# Altium PCB PCB1.PcbDoc
Units mil, origin at the board's own origin, x right, y up, seen from the top; angles counter-clockwise.
Board outline 2415 x 1225 mil, 2 copper layers (Top Layer, Bottom Layer); 31 components, 34 nets, 118 pads, 32 vias.
Unrouted connection lines stored in the file: 5.
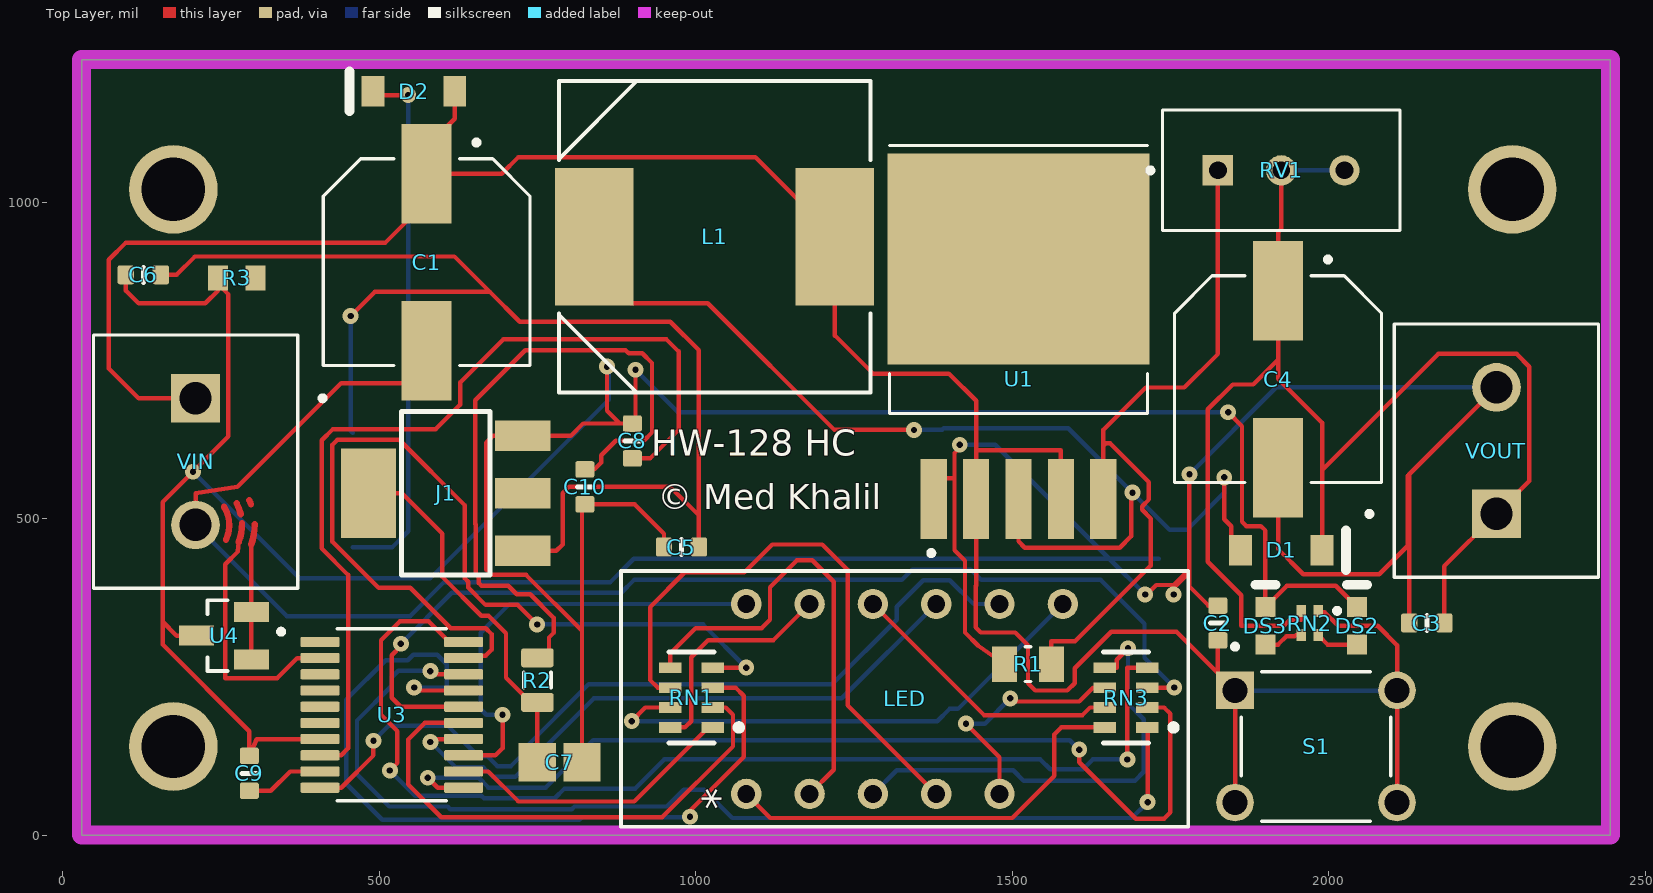
[diagram p0: Top Layer view]
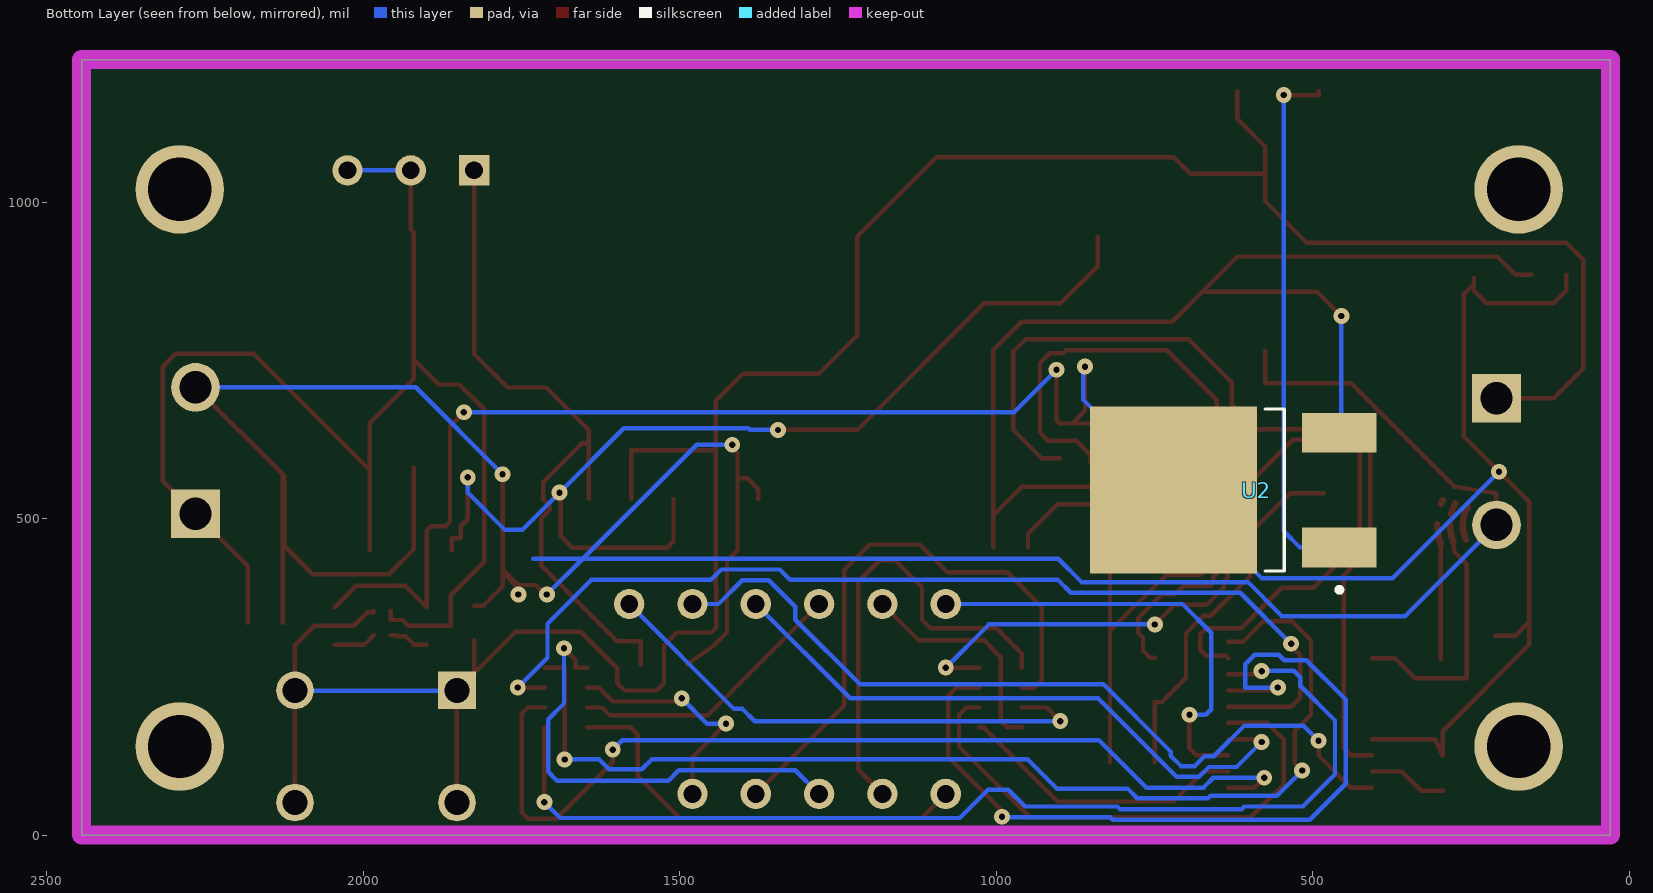
[diagram p1: Bottom Layer view, seen from below]
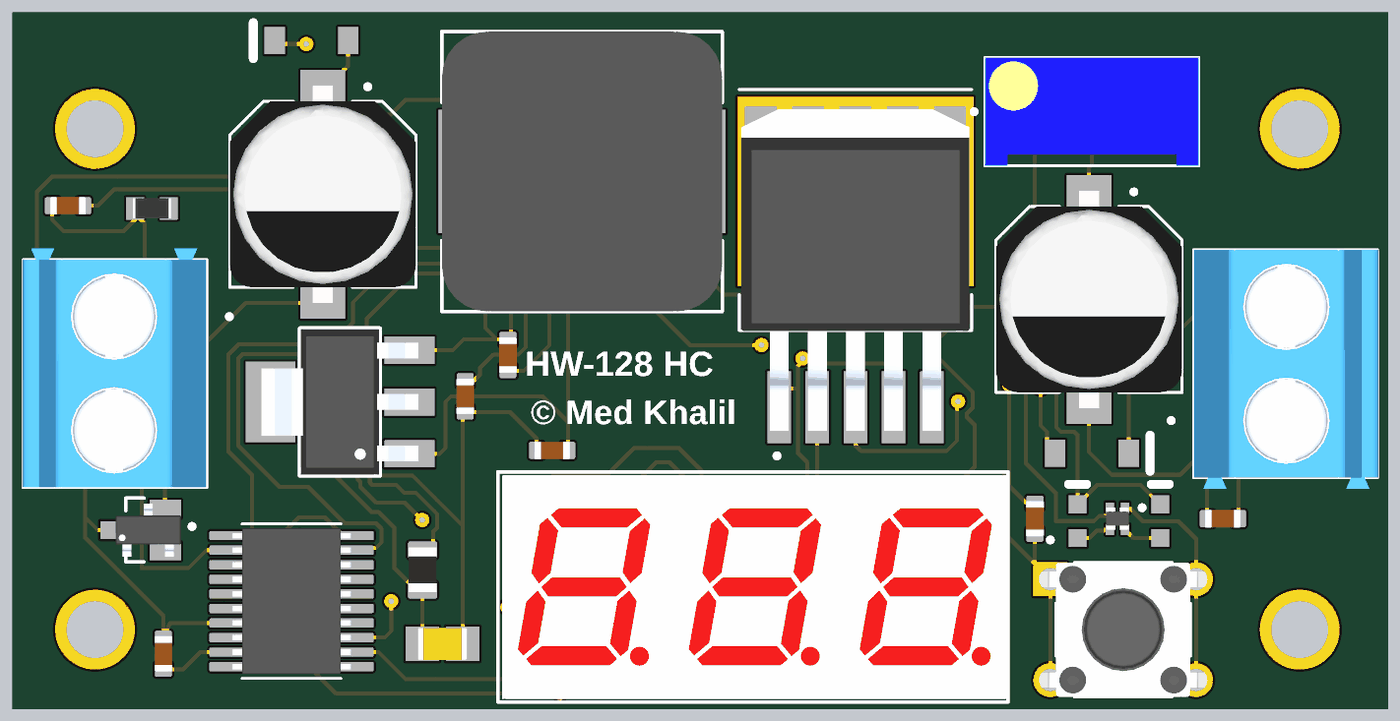
[diagram p2: 3D render of the assembled board from above, using the file's embedded part models]

## Layer stack, top to bottom
Top Solder: solder mask 0.4, Solder Resist, Dk 3.5
Top Layer: signal copper 1.4
Dielectric 1: dielectric 12.6, FR-4, Dk 4.8
Bottom Layer: signal copper 1.4
Bottom Solder: solder mask 0.4, Solder Resist, Dk 3.5

## Board outline
30,0 30,1225 2445,1225 2445,0

## Design rules (kind name [scope] priority, off if disabled: settings)
Clearance [All] p1: gap=10 ignorepadtopadclearanceinfootprint=FALSE
PolygonConnect [All] p1: connectstyle=Relief reliefconductorwidth=10 reliefentries=4 polygonreliefangle="90 Angle" airgapwidth=10
RoutingVias [All] p1: holewidth=10 width=25 viastyle="Through Hole" minholewidth=10 minwidth=25 maxholewidth=10 maxwidth=25
SolderMaskExpansion [All] p1: expansion=4 istentingtop=FALSE
SupplyNets "Schematic Supply Nets_1" [InNet('+3.3')] p1: voltage=0.000
SupplyNets "Schematic Supply Nets" [InNet('GND')] p2: voltage=0.000
Width [All] p1: maxlimit=7 minlimit=7 preferedwidth=7 minimp=50.000000 maximp=50.000000 favimp=50.000000
30 further rules are at their usual default settings.

## Components (designator, comment, footprint, x,y, rotation, side; value= is the part's Value field where it differs from the comment)
C1 "EEEFK1V221P" CAP_EEEFK1V221P 575,905 r270 top
C2 "Capacitor 10µF +/-20% 10V 0603" CAPC0603(1608)100_L 1825,335 r270 top value=10µF
C3 "Capacitor 10µF +/-20% 10V 0603" CAPC0603(1608)100_L 2155,335 r0 top value=10µF
C4 "EEEFK1V221P" CAP_EEEFK1V221P 1920,720.24 r270 top
C5 "Capacitor 10µF +/-20% 10V 0603" CAPC0603(1608)100_L 977.56,455 r0 top value=10µF
C6 "Capacitor 10µF +/-20% 10V 0603" CAPC0603(1608)100_L 127.56,885 r0 top value=10µF
C7 "Capacitor 1 uF +/- 10% 25 V 0805" CAPC2013X145X50ML20T25 785,115 r180 top value=1µF
C8 "Capacitor 10µF +/-20% 10V 0603" CAPC0603(1608)100_L 900,622.56 r270 top value=10µF
C9 "Capacitor 10µF +/-20% 10V 0603" CAPC0603(1608)100_L 295,97.56 r270 top value=10µF
C10 "Capacitor 10µF +/-20% 10V 0603" CAPC0603(1608)100_L 825,550 r270 top value=10µF
D1 "B5819W" MCC-SOD123_V 1925,450 r0 top
D2 "B5819W" MCC-SOD123_V 555,1175 r180 top
DS2 "HSMH-C190" AVAG-HSMX-C190_V 2045,330.47 r90 top
DS3 "LTST-C190GKT" LTST-C190GKT_V 1900,330.47 r90 top
J1 "LD1117AS33" SOT223 605,540 r90 top
L1 "DR125-470-R" INDM125125X600N 1030,945 r0 top
LED "LDT-N2804RI" LDT-N2804RI_LUM 1080,65 r90 top
R1 "CR0805-FX-3300ELF" RESC2012X60N 1525,270 r0 top
R2 "Resistor 470R +/-5% 0805 125 mW" RESC0805(2012)_L 750,245 r90 top value=470
R3 "Resistor 0R +/- 5% 0603 100 mW" RESC1608X55X25ML10T15 275,880 r0 top value=0
RN1 "CAY16-101J4LF" FP-CAY16-J4-MFG 993.46,217.24 r90 top
RN2 "EXB-U24202JX" RESCAXE_EXB-U24202JX 1970,335 r180 top
RN3 "CAY16-101J4LF" FP-CAY16-J4-MFG 1680,217.24 r90 top
RV1 "3296W1103LF" TRIM_3296W1103LF 1925,1050 r0 top
S1 "TS02-66-60-BK-100-LCR-D" SW_TS02-66-60-BK-100-LCR-D 1980,140 r0 top
U1 "XL6009" DPAK170P1435X465-6N 1510,772.2 r90 top
U2 "L78M05CDT" VREG_L78M05CDT 625.51,545 r0 bottom
U3 "STM8S003F3P6" SOP65P640X120-20N 520,190 r0 top
U4 "TL431LIBCDBZR" SOT23 255,315 r90 top
VIN "TB006-508-02BE" CUI_TB006-508-02BE 210,690 r270 top
VOUT "TB006-508-02BE" CUI_TB006-508-02BE 2265,507.34 r90 top

## Footprints (in the part's own frame and the unit in brackets; to place one, negate y for a bottom-side part, rotate by r counter-clockwise, add the part's x,y. Pads: shape width x height; smd on the part's side, far side on the other; paste and mask are expansions set on the pad)
AVAG-HSMX-C190_V [mm] "SMD, 2-Leads, Body 1.6x0.8mm, Height 0.9mm"
  rect 0.8x0.8 smd: 1(-0.75,0) 2(0.75,0)
  silkscreen extent 1.65,-0.4 1.65,0.4, body extent -0.8,-0.4 0.8,0.4, height 0.9
CAP_EEEFK1V221P [mm]
  rect 4x2 smd: 1(-3.55,0) 2(3.55,0)
  silkscreen extent -4.9,-4.15 4.15,4.15, body extent -4.85,-4.15 4.85,4.15, height 10.2
CAPC0603(1608)100_L [mil] "Chip Capacitor, Body 1.6x0.8mm, Height 1.0mm, IPC High Density"
  rrect25% 26x29.92 smd: 1(-27.56,0) 2(27.56,0)
  silkscreen extent 0,-12 0,12, body extent -31,-16 31,16, height 37
CAPC2013X145X50ML20T25 [mm] "Chip Capacitor, 2-Leads, Body 2.2x1.45mm, IPC Low Density"
  rect 1.5x1.55 smd: 1(-0.9,0) 2(0.9,0)
  body extent -1.1,-0.72 1.1,0.73, height 1.45
CUI_TB006-508-02BE [mm]
  rect 1.95x1.95 / inner round 1.95 / far side rect 1.95x1.95 hole 1.3: 1(0,0)
  round 1.95 hole 1.3: 2(5.08,0)
  silkscreen extent -2.54,-4.1 7.62,5.2, body extent -3.04,-4.14 7.62,4.06, height 10
DPAK170P1435X465-6N [mm]
  rect 3.21x1.05 smd: 1(-6.13,3.4) 2(-6.13,1.7) 3(-6.13,0) 4(-6.13,-1.7) 5(-6.13,-3.4)
  rect 8.46x10.53 smd paste-6: 6(3.5,0)
  silkscreen extent -8.4,-5.18 8.05,5.18, body extent -7.17,-5.08 7.17,5.08, height 4.65
FP-CAY16-J4-MFG [mm]
  rect 0.425x0.9 smd paste+0 mask+0: 1(-1.2,-0.85) 2(-0.4,-0.85) 3(0.4,-0.85) 4(1.2,-0.85) 5(1.2,0.85) 6(0.4,0.85) 7(-0.4,0.85) 8(-1.2,0.85)
  silkscreen extent -1.82,-2.02 1.82,0.9, body extent -1.8,-1.4 1.8,1.4, height 0.25
INDM125125X600N [mil]
  rect 124x217 smd: 1(-190,0) 2(190,0)
  silkscreen extent -246,-246 246,246, body extent -246,-246 246,246, height 217
LDT-N2804RI_LUM [mil]
  round 48 hole 28: 1(0,0) 2(0,-100) 3(0,-200) 4(0,-300) 5(0,-400) 7(300,-500) 8(300,-400) 9(300,-300) 10(300,-200) 11(300,-100) 12(300,0)
  silkscreen extent -52,-698 352,198, body extent -47,-697 347,190, height 240
LTST-C190GKT_V [mm] "SMD, 2-Leads, Body 1.6x0.8mm"
  rect 0.8x0.8 smd: 1(-0.75,0) 2(0.75,0)
  silkscreen extent 1.65,-0.4 1.65,0.4, body extent -0.8,-0.4 0.8,0.4, height 0.9
MCC-SOD123_V [mil] "SOD123, 2-Leads, Body 2.7x1.6mm, Height 1.35mm"
  rect 35.98x47.99 smd: 1(-64.5,0) 2(64.5,0)
  silkscreen extent 102,-31 102,31, body extent -53,-31 53,31, height 53
RESC0805(2012)_L [mm] "Chip Resistor, Body 2.0x1.3mm, IPC High Density"
  rrect25% 0.76x1.3 smd: 1(-0.9,0) 2(0.89,0)
  silkscreen extent -0.3,-0.55 0.3,0.55, body extent -1,-0.62 1,0.63, height 0.6
RESC1608X55X25ML10T15 [mm] "Chip Resistor, 2-Leads, Body 1.70x0.90mm, IPC Low Density"
  rect 0.8x1 smd: 1(-0.75,0) 2(0.75,0)
  body extent -0.85,-0.45 0.85,0.45, height 0.55
RESC2012X60N [mm]
  rect 1x1.42 smd: 1(-0.935,0) 2(0.935,0)
  silkscreen extent -0.12,-0.7 0.12,0.7, body extent -1,-0.63 1,0.63, height 0.55
RESCAXE_EXB-U24202JX [mm]
  rect 0.375x0.475 smd: 1(-0.338,-0.487) 2(0.338,-0.487) 3(0.338,0.487) 4(-0.338,0.487)
  silkscreen extent -1.2,-0.59 -1,-0.39, body extent -0.5,-0.5 0.5,0.5, height 0.45
SOP65P640X120-20N [mm]
  rrect25% 1.56x0.41 smd: 1(-2.88,2.925) 2(-2.88,2.275) 3(-2.88,1.625) 4(-2.88,0.975) 5(-2.88,0.325) 6(-2.88,-0.325) 7(-2.88,-0.975) 8(-2.88,-1.625) 9(-2.88,-2.275) 10(-2.88,-2.925) 11(2.88,-2.925) 12(2.88,-2.275) 13(2.88,-1.625) 14(2.88,-0.975) 15(2.88,-0.325) 16(2.88,0.325) 17(2.88,0.975) 18(2.88,1.625) 19(2.88,2.275) 20(2.88,2.925)
  silkscreen extent -4.54,-3.45 2.2,3.45, body extent -3.2,-3.25 3.2,3.25, height 0.53
SOT23 [mm]
  rect 0.8x1.4 smd: 1(-0.95,-1.1) 2(0.95,-1.1) 3(0,1.1)
  silkscreen extent -1.42,-0.15 1.42,0.66, body extent -1.46,-1.52 1.46,0.85, height 1.12
SOT223 [mm]
  rect 1.219x2.235 smd: 1(-2.311,-3.099) 2(0,-3.099) 3(2.311,-3.099)
  rect 3.6x2.2 smd: TAB(0,3.099)
  silkscreen extent -3.28,-1.78 3.28,1.78, body extent -3.25,-3.5 3.25,3.5, height 1.8
SW_TS02-66-60-BK-100-LCR-D [mm]
  rect 1.508x1.508 / inner round 1.508 / far side rect 1.508x1.508 hole 1: 1(-3.25,2.25)
  round 1.508 hole 1: 2(3.25,2.25) 3(-3.25,-2.25) 4(3.25,-2.25)
  silkscreen extent -3.35,-3 3,4.1, body extent -3.95,-3 3.95,3, height 6
TRIM_3296W1103LF [mm]
  rect 1.218x1.218 hole 0.71: 1(-2.54,0)
  round 1.218 hole 0.71: 2(0,0) 3(2.54,0)
  silkscreen extent -5.35,-2.41 4.76,2.42, body extent -4.76,-2.41 4.76,2.42, height 11.18
VREG_L78M05CDT [mm]
  rect 3x1.6 smd: 1(-4.25,2.3) 3(-4.25,-2.3)
  rect 6.7x6.7 smd paste-2.645: 2(2.4,0)
  silkscreen extent -4.35,-3.25 -1.26,4.1, body extent -4.72,-3.25 5,3.25, height 2.4

## Part data
C1 C4: "220ÂµF 35V Aluminum Electrolytic Capacitors Radial, Can - SMD 2000 Hrs @ 105Â°C", Package="RADIAL-2 Panasonic", Check_prices=https://www.snapeda.com/parts/EEEFK1V221P/Panasonic/view-part/?ref=eda, MF=Panasonic, MP=EEEFK1V221P, SnapEDA_Link=https://www.snapeda.com/parts/EEEFK1V221P/Panasonic/view-part/?ref=snap
C2 C3 C5 C6 C8 C9 C10: library part CMP-001-00075-4, "Chip Capacitor, 10µF +/-20%, 10V, 0603, Thickness 1 mm", Case/Package=0603, Max Operating Temperature=85°C, Min Operating Temperature=-55°C, Tolerance=10%, Voltage Rating=10V, Mounting Technology=SMT, Pins=2
C7: library part CMP-001-00010-6, "Chip Capacitor, 1 uF, +/-10%, 25 V, 0805 (2012 Metric)", Capacitor Type=Ceramic, Case/Package=0805, Max Operating Temperature=125°C, Min Operating Temperature=-55°C, Tolerance=10%, Voltage Rating=25V, Mounting Technology=SM, Pins=2, RoHS Compliant=True
D1 D2: library part CMP-004-00005-2, "Schottky Barrier Rectifier, 40 V, 1 A, -65 to 125 degC, 2-Pin SOD123, RoHS, Tape and Reel", Case/Package=SOD123, Manufacturer="Micro Commercial Components", Package Description="2-Pin Small Outline Diode, Body 2.7 x 1.6 mm, Height 1.35 mm", Datasheet URL=http://www.mccsemi.com/up_pdf/B5817W-B5819W(SOD-123).pdf, Datasheet Version="Rev. B, 01/2013", Manufacturer URL=http://www.mccsemi.com/, Mounting Technology=SM, Package Reference=SOD123, Package URL=http://www.mccsemi.com/up_pdf/1N4448W(SOD-123).pdf, RoHS Compliant=Unknown
DS2: library part CMP-007-00014-2, "LED Uni-Color Red, 65 mW, 20 mA, -40 to 85 degC, 2-Pin SMD, RoHS, Tape and Reel", Case/Package=0603, Colour=Red, Forward Current=20mA, Forward Voltage=1.8V, Manufacturer=Avago, Max Operating Temperature=85°C, Min Operating Temperature=-40°C, Package Description="2-Pin Surface Mount Device, Body 1.6 x 0.8 mm, Height 0.9 mm", Package Quantity=4000, Package Reference=HSMX-C190, Power=78mW, Datasheet URL=http://docs.avagotech.com/docs/AV02-0551EN, Datasheet Version=Mar-12, Illumination Colour=Red, Lens Style=Diffused, Luminous Intensity=17mcd, Manufacturer URL=http://www.avagotech.com/, Mounting Technology=SM, Nominal Vf=1.8V, Packaging=TapeandReel, Pins=2, RoHS Compliant=True, Viewing Angle=170degrees
DS3: library part CMP-007-00022-2, "LED Uni-Color Green, 100 mW, 30 mA, -55 to 85 degC, 2-Pin SMD, RoHS, Tape and Reel", Case/Package=0603, Colour=Green, Forward Current=20mA, Forward Voltage=2.1V, Manufacturer=Lite-On, Max Operating Temperature=85°C, Min Operating Temperature=-55°C, Package Description="2-Pin Surface Mount Device, Body 1.6 x 0.8 mm", Package Quantity=3000, Package Reference=C190GKT, Power=100mW, Datasheet URL=http://datasheet.octopart.com/LTST-C190GKT-Lite-On-datasheet-158530.pdf, Datasheet Version=Dec-06, Illumination Colour=Green, Lens Style=Clear, Luminous Intensity=6mcd, Manufacturer URL=http://www.us.liteon.com/, Mounting Technology=SM, Nominal Vf=2.1V, Packaging=TapeandReel, Pins=2, RoHS Compliant=True, Viewing Angle=130degrees
J1: "Linear Voltage Regulator IC Positive Fixed 1 Output 1A SOT-223", Package="SOT-223 STMicroelectronics", Check_prices=https://www.snapeda.com/parts/LD1117AS33/STMicroelectronics/view-part/?ref=eda, MF=STMicroelectronics, MP=LD1117AS33, SnapEDA_Link=https://www.snapeda.com/parts/LD1117AS33/STMicroelectronics/view-part/?ref=snap
L1: "47ÂµH Shielded Wirewound Inductor 2.71A 74mOhm Nonstandard", Package="Nonstandard Eaton", Check_prices=https://www.snapeda.com/parts/DR125-470-R/Eaton/view-part/2729976/?ref=eda, Digi-Key_Part_Number=513-1128-1-ND, MF=Eaton, MP=DR125-470-R, Purchase-URL=https://pricing.snapeda.com/search/part/DR125-470-R/?ref=eda, SnapEDA_Link=https://www.snapeda.com/parts/DR125-470-R/Eaton/view-part/2729976/?ref=snap
LED: "Display Modules - LED Character and Numeric Red 7-Segment 3 Character Common Cathode 2V 10mA 0.394 H x 0.887 W x 0.240 D (10.00mm x 22.53mm x 6.10mm) 12-DIP (0.300, 7.62mm), 11 Leads", Package=None, Check_prices=https://www.snapeda.com/parts/LDT-N2804RI/Lumex/view-part/?ref=eda, MF="Lumex Opto/Components", MP=LDT-N2804RI, SnapEDA_Link=https://www.snapeda.com/parts/LDT-N2804RI/Lumex/view-part/?ref=snap
R1: "330 Ohms Â±1% 0.125W, 1/8W Chip Resistor 0805 _2012 Metric_ Moisture Resistant Thick Film", Package="2012 Bourns", Availability=Unavailable, MF=Bourns, MP=CR0805-FX-3300ELF, Price=None, SnapEDA_Link=https://www.snapeda.com/parts/CR0805-FX-3300ELF/Bourns/view-part/942422/?ref=snap
R2: library part CMP-009-00122-3, "Chip Resistor, 470 Ohms, +/-5%, 125 mW, -55 to 155 degC, 0805", Case/Package=0805, Max Operating Temperature=155°C, Min Operating Temperature=-55°C, Power=125mW, Tolerance=5%, Pins=2
R3: library part CMP-009-00006-5, "Chip Resistor, 0 Ohm, 0.1 W, -55 to 155 degC, 0603 (1608 Metric)", Case/Package=0603, Max Operating Temperature=155°C, Min Operating Temperature=-55°C, Power=100mW, Tolerance=5%, Voltage Rating=50V, Mounting Technology=SM, Pins=2, RoHS Compliant=True
RN1 RN3: library part CMP-07230-000011-1, "RES ARRAY 4 RES 100 OHM 1206", Case Code (Imperial)=1206, Case Code (Metric)=3216, Max Operating Temperature=125°C, Min Operating Temperature=-55°C, Number of Resistors=4, Package Quantity=5000, Power Per Element=62.5mW, Power Rating=248mW, Resistance=100R, Resistance Tolerance=5%, Temperature Coefficient=200ppm/°C, Voltage Rating=50V, Case/Package=1206, Circuit Type=Isolated, Contact Plating=Tin, Depth=1.6mm, Height=0.024inch, Length=3.2mm, Military Standard=Not, Mount="Surface Mount", Number of Circuits=4, Number of Elements=4, Number of Pins=8, Number of Terminals/Pins=8, Packaging="Tape and Reel", Radiation Hardening=No, REACH SVHC="No SVHC", Series=CAY16, Technology="THICK FILM", Terminal Pitch=0.8mm, Termination=Convex, Tolerance=5%, Voltage Rating (DC)=50V, Width=0.063inch
RN2: "Series/Type: Anti-Sulfurated Chip Resistor Array, Power Rating (W): 0.063, Chip Size (LxW) (mm): 1.0 X 1.0, Resistance Values (â„", Package="NON STANDARD-4 Panasonic", Check_prices=https://www.snapeda.com/parts/EXB-U24202JX/Panasonic/view-part/?ref=eda, MF=Panasonic, MP=EXB-U24202JX, SnapEDA_Link=https://www.snapeda.com/parts/EXB-U24202JX/Panasonic/view-part/?ref=snap
RV1: "Trimmer, Potentiometer 10kohm 25turn Thd", Package=None, Availability=Unavailable, Check_prices=https://www.snapeda.com/parts/3296W1103LF/Bourns/view-part/2487625/?ref=eda, MF=Bourns, MP=3296W1103LF, Price=None, SnapEDA_Link=https://www.snapeda.com/parts/3296W1103LF/Bourns/view-part/2487625/?ref=snap
S1: "6 x 6 mm, 6 mm Actuator Height, 100 gf, Black, Long Crimped, Through Hole, SPST, Tactile Switch", Package=None, Check_prices=https://www.snapeda.com/parts/TS02-66-60-BK-100-LCR-D/Same+Sky/view-part/?ref=eda, MF="Same Sky", MP=TS02-66-60-BK-100-LCR-D, SnapEDA_Link=https://www.snapeda.com/parts/TS02-66-60-BK-100-LCR-D/Same+Sky/view-part/?ref=snap
U1: "The XL6009 regulator is a wide input range, current mode, DC/DC converter which is capable of generating either positive or negative output voltages.", Package="TO-263-5L XLSEMI", Availability="Not in stock", Check_prices=https://www.snapeda.com/parts/XL6009/XLSEMI/view-part/?ref=eda, MF=XLSEMI, MP=XL6009, Price=None, SnapEDA_Link=https://www.snapeda.com/parts/XL6009/XLSEMI/view-part/?ref=snap
U2: "7805 based precision 5V fixed regulator with output current of up to 500mA and wide temperature operating range of 0Â°C to 150Â°C.", Package="TO-252-3 STMicroelectronics", Check_prices=https://www.snapeda.com/parts/L78M05CDT/STMicroelectronics/view-part/?ref=eda, MF=STMicroelectronics, MP=L78M05CDT, SnapEDA_Link=https://www.snapeda.com/parts/L78M05CDT/STMicroelectronics/view-part/?ref=snap
U3: "STM8 series Microcontroller IC 8-Bit 16MHz 8KB (8K x 8) FLASH 20-TSSOP", Package="TSSOP-20 STMicroelectronics", Check_prices=https://www.snapeda.com/parts/STM8S003F3P6/STMicroelectronics/view-part/?ref=eda, MF=STMicroelectronics, MP=STM8S003F3P6, SnapEDA_Link=https://www.snapeda.com/parts/STM8S003F3P6/STMicroelectronics/view-part/?ref=snap
U4: "Adjustable precision shunt regulator with optimized reference current (pin layout: KRA)", Package="SOT-23-3 Texas Instruments", Check_prices=https://www.snapeda.com/parts/TL431LIBCDBZR/Texas+Instruments/view-part/?ref=eda, MF="Texas Instruments", MP=TL431LIBCDBZR, SnapEDA_Link=https://www.snapeda.com/parts/TL431LIBCDBZR/Texas+Instruments/view-part/?ref=snap
VIN VOUT: "2~24 Poles, Screw Type, Horizontal, 5.08 Pitch, 26~14 (AWG), Terminal Block Connector", Package=None, Check_prices=https://www.snapeda.com/parts/TB006-508-02BE/Same+Sky/view-part/?ref=eda, MF="Same Sky", MP=TB006-508-02BE, SnapEDA_Link=https://www.snapeda.com/parts/TB006-508-02BE/Same+Sky/view-part/?ref=snap

## Free pads (board coordinates)
  round 140 hole 100: 3(175,140) 3(175,1020) 3(2290,140) 3(2290,1020)

## Via types
v1: diameter 25, hole 10, Top Layer to Bottom Layer, 32 vias

## Nets (pads, with @x,y where several pads share a name; then routed paths per layer and width w, separated by ;. In a path a pad name is that pad's centre, name@x,y a point inside that pad or via, vN(x,y) a via of type N, cw(c..) or ccw(c..) an arc to the next point about the centre after c; other vN are vias at no path point)
+3.3: C7.2 J1.TAB R2.1 | length 579.9
  Top Layer w7: J1.TAB 536,540 599.97,476.03 599.97,407.7 661.15,346.52 672.75,346.52 700.37,318.9 700.37,248.56 739.37,209.57 R2.1 750,162.43 749.57,162 C7.2
GND: C5.1 C6.1 C7.1 C8.1 C9.1 C10.2 DS2.2 DS3.2 J1.3 R3.1 U2.2 U3.7 U4.3 | length 5087.2
  Top Layer w7: C6.1 100,860 120,840 225.47,840 245.47,860 R3.1@245.47,870.53 ; U4.3 180,315 158,337 ; R3.1 R3.1@245.47,870.53 ; U3.7 306.61,151.61 C9.1 295,164 158,301 158,337 ; C7.1 820.43,315.14 ; v1(860,740) 860,670.12 880,650.12 ; v1(905,735) 905,655.12 C8.1 880,650.12 ; C5.1 950,476 903.56,522.44 C10.2 820.43,517.87 820.43,315.14 ; v1(1841.12,667.88) 1863,646 1863,495 1870,488 1893,488 1900,481 DS3.2 1934,394 2011,394 DS2.2 ; 158,337 158,526 v1(206,574) 262,630 262,854 R3.1@245.47,870.53 ; 820.43,315.14 820.43,322.67 732.11,411 677.94,411 669.51,419.43 669.51,497.64 669,498.15 669,620 679.98,630.98 J1.3 803,630.98 822.14,650.12 880,650.12
  Top Layer w10: 255,518.72 cw(c210,490) 258.05,466.74
  Bottom Layer w7: v1(206,574) 374,406 581,406 U2.2 863,688 863,737 v1(860,740) ; v1(905,735) 972.12,667.88 v1(1841.12,667.88)
NetC5_2: C5.2 C6.2 J1.1 U2.3 | length 2041.8
  Top Layer w7: C6.2 180,885 209,914 619,914 675,858 ; v1(455,820) 493,858 675,858 ; J1.1 780,449.02 790,459.02 790,540 800,550 960,550 1005.12,504.88 ; C5.2 1005.12,504.88 ; 675,858 722,811 960,811 1005.12,765.88 1005.12,504.88
  Bottom Layer w7: v1(455,820) 455,638.74 U2.3
NetC8_2: C8.2 U3.8 | length 1426.6
  Top Layer w7: U3.8 440,126.02 451,137.02 451,411 409.18,452.82 409.18,623.5 427.05,641.37 589.37,641.37 628,680 628,715 696,783 954,783 973,764 973,640 928,595 C8.2
NetC9_2: C9.2 U3.9 | length 124.2
  Top Layer w7: C9.2 329,70 359.43,100.43 U3.9
NetC10_1: C10.1 R2.2 U4.1 U4.2 | length 1297.4
  Top Layer w7: 298.05,458.89 298,458.84 298,352.4 U4.2 U4.1 ; R2.2 756.91,280.04 768.35,291.48 768.35,312.09 775.57,319.3 775.57,343.5 738.54,380.52 717.48,380.52 704,394 661.76,394 657.66,398.1 657.66,407.24 652.51,412.39 652.51,490.59 652,491.11 652,687 731,766 889.23,766 894.23,761 915.77,761 931,745.77 931,635.97 918.03,623 874,623 851,600 851,588.56 840,577.56 C10.1
  Top Layer w10: 295,528.68 cw(c210,490) 297.53,522.56 ; 298.05,458.89 ccw(c210,490) 303.38,490.77
NetD1_1: D1.1 L1.1 U1.3 | length 1725.8
  Top Layer w7: L1.1 840,898.5 898.5,840 1019.31,840 1219.31,640 v1(1345,640) ; U1.3 1510,464 1520,454 1669.94,454 1688.28,472.34 1688.28,539.28 v1(1690,541) ; v1(1835.05,565) 1835.05,498.91 1846.01,487.95 1846.01,470.5 1847.5,469 1860.5,469 D1.1
  Bottom Layer w7: v1(1345,640) 1389.3,640 1391.85,642.55 1588.44,642.55 1687,544 v1@1687,541 ; v1@1687,538 v1(1690,541) ; v1@1690,538 1693,538 1749,482 1776,482 1835.05,541.05 v1(1835.05,565)
NetD2_2: D2.2 U2.1 | length 848.9
  Top Layer w7: D2.2 490.5,1169 v1(546,1169)
  Bottom Layer w7: U2.1 520.45,454.45 546,480 v1(546,1169)
NetDS2_1: DS2.1 RN2.4 | length 67.9
  Top Layer w7: RN2.4 1998.15,300.94 DS2.1
NetDS3_1: DS3.1 RN2.3 | length 62.9
  Top Layer w7: DS3.1 1920,300.94 1932.81,313.75 1946.25,313.75 1948.3,315.81 RN2.3
NetLED_1: LED.1 RN3.8 | length 679.8
  Top Layer w7: LED.1 1118,27 1500,27 1566.49,93.49 1566.49,158.88 1577.61,170 RN3.8
NetLED_2: LED.2 RN1.5 | length 736.4
  Top Layer w7: RN1.5 960,287 1000,327 1104.5,327 1117.5,340 1117.5,391.5 1160,434 1184,434 1218,400 1218,103 LED.2
NetLED_3: LED.3 RN3.5 | length 718
  Top Layer w7: RN3.5 1665,264.49 1665,277 v1(1683,295)
  Bottom Layer w7: LED.3 1317.5,102.5 1501.5,102.5 1518,86 1694,86 1708,100 1708,183 1683,208 v1(1683,295)
NetLED_4: LED.4 RN1.6 | length 933.5
  Top Layer w7: RN1.6 940,232.99 928,244.99 928,360 983,415 1077,415 1121,459 1200,459 1240,419 1240,205 LED.4
NetLED_5: LED.5 RN3.6 | length 380.2
  Top Layer w7: v1(1427,176) 1480,123 LED.5 ; v1(1497,216) 1502,211 1606,211 1627.99,232.99 RN3.6
  Bottom Layer w7: v1(1427,176) 1457,176 v1(1497,216)
NetLED_7: LED.7 RN1.7 | length 827.5
  Top Layer w7: v1(899,180) 920.5,201.5 RN1.7
  Bottom Layer w7: v1(899,180) 1381.71,180 1401,199.29 1414.29,199.29 LED.7
NetLED_10: LED.10 RN3.7 | length 444.2
  Top Layer w7: LED.10 1455.44,189.56 1611.06,189.56 1623,201.5 RN3.7
NetLED_11: LED.11 RN1.8 | length 359.9
  Top Layer w7: RN1.8 983,170 993,180 993,281 1020,308 1123,308 LED.11
NetR1_2: R1.2 RV1.1 U1.5 | length 1113.8
  Top Layer w7: R1.2 1561.81,306.03 1599.26,306.03 1719,425.77 1719,500 1705.28,513.72 1705.28,519.51 1716,530.23 1716,557.43 1654.73,618.7 1647.96,618.7 1643.86,614.6 ; U1.5 1643.86,614.6 ; RV1.1 1825,760 1772,707 1710.86,707 1643.86,640 1643.86,614.6
NetR3_2: R3.2 U3.2 | length 435.2
  Top Layer w7: 278.05,462.53 277,448 257,428 257,248 339,248 370.57,279.57 U3.2
  Top Layer w10: 275,524.07 cw(c210,490) 281.44,506.77 ; 278.05,462.53 ccw(c210,490) 283.33,492.95
PA3: LED.8 U3.10 | length 1307.1
  Top Layer w7: U3.10 440,74.84 491,125.84 v1(491,149)
  Bottom Layer w7: v1(491,149) 515,173 608,173 656.5,124.5 671.27,124.5 686.77,109 708.31,109 724.76,125.45 724.76,132 831.25,238.49 1215.99,238.49 1317.5,340 1317.5,360.5 1359.5,402.5 1401.5,402.5 1439,365 LED.8
PB4: RN1.1 U3.12 | length 461.7
  Top Layer w7: U3.12 672.57,100.43 720,53 903,53 1020,170 RN1.1
PB5: RN3.2 U3.11 | length 1537.1
  Top Layer w7: v1(576.84,90.5) 592.5,74.84 U3.11 ; v1(1606,135) 1606,115 1695,26 1740,26 1750,36 1750,191.5 1740,201.5 RN3.2
  Bottom Layer w7: v1(576.84,90.5) 657.19,90.5 672.69,75 763,75 838,150 1591,150 v1(1606,135)
PC3: LED.12 U3.13 | length 716
  Top Layer w7: U3.13 683.69,126.02 695,137.33 v1(695,190)
  Bottom Layer w7: v1(695,190) 669.43,190 660.59,198.84 660.59,319.59 706,365 LED.12
PC4: LED.9 U3.14 | length 989.2
  Top Layer w7: v1(581,147) 585.61,151.61 U3.14
  Bottom Layer w7: v1(581,147) 620.5,107.5 664.23,107.5 679.73,92 715.35,92 839.35,216 1231,216 LED.9
PC5: RN1.2 U3.15 | length 837.1
  Top Layer w7: U3.15 572.2,177.2 545.96,150.96 545.96,80 597.96,28 947,28 1059,140 1059,190 1047.5,201.5 RN1.2
PC6: RN3.3 U3.16 | length 1632.2
  Top Layer w7: v1(534.39,302.37) 534.39,298.61 520,284.23 520,217 534.2,202.8 U3.16 ; RN3.3 v1(1756,232.99)
  Bottom Layer w7: v1(534.39,302.37) 614.63,382.61 882.39,382.61 902.78,403 1325.5,403 1342,419.5 1434.5,419.5 1451,403 1640,403 1709,334 1709,279.99 v1(1756,232.99)
PC7: RN1.3 U3.17 | length 1345.7
  Top Layer w7: v1(555.23,233) 559.84,228.39 U3.17 ; v1(991,29) 991,38.5 1076,123.5 1076,220 1063.01,232.99 RN1.3
  Bottom Layer w7: v1(555.23,233) 607,233 607,269.77 591.77,285 553.79,285 545.16,276.37 510.37,276.37 448,214 448,81 505,24 816.35,24 820.52,28.17 990.17,28.17 v1(991,29)
PD1: RN3.1 U3.18 | length 1727.9
  Top Layer w7: v1(581,259) 586.02,253.98 U3.18 ; RN3.1 1714,170 v1(1714,52)
  Bottom Layer w7: v1(581,259) 580.63,259.37 530,259.37 520,249.37 520,236 465,181 465,96 515.83,45.17 608.13,45.17 612.3,41 804.4,41 808.57,45.17 954.37,45.17 981,71.8 1013.2,71.8 1058,27 1689,27 v1(1714,52)
PD2: RN1.4 U3.19 | length 1471.5
  Top Layer w7: U3.19 637.41,283.59 668.5,283.59 677.59,292.68 677.59,317.64 668.5,326.73 613.22,326.73 549.36,390.59 499.14,390.59 426.18,463.54 426.18,616.46 434.09,624.37 531.89,624.37 635,521.26 635,465.04 635.51,464.53 635.51,405.34 640.66,400.2 640.66,391.06 668.19,363.52 718.77,363.52 v1(749.57,332.73) ; RN1.4 v1(1080,264.49)
  Bottom Layer w7: v1(749.57,332.73) 1011.76,332.73 v1(1080,264.49)
PD3: RN3.4 U3.20 | length 1775.5
  Top Layer w7: v1(517,102) 528.96,113.96 528.96,164.04 503,190 503,307.75 532.73,337.48 578.42,337.48 610.75,305.16 U3.20 ; v1(1682,119.5) 1682,264.49 RN3.4
  Bottom Layer w7: v1(517,102) 556.83,62.17 661.48,62.17 665.65,58 777.32,58 792.82,73.5 904.5,73.5 950.5,119.5 1544.5,119.5 1560,104 1612,104 1627.5,119.5 v1(1682,119.5)
VIN+: C1.1 C2.2 D2.1 L1.2 RN2.1 S1.1 S1.2 S1.3 S1.4 U1.2 U1.4 VIN.1 | length 4218.3
  Top Layer w7: VIN.1 120,690 73,737 73,909 100,936 510,936 575,1001 C1.1 ; D2.1 619.5,1131.5 575,1087 C1.1 ; U1.4 1576.93,607.56 1443.07,607.56 ; C2.2 S1.1@1825,255.63 ; S1.3 S1.1 S1.1@1825,255.63 ; RN2.1 1983.29,352 1993.47,352 2015,330.47 2077.53,330.47 2107.95,300.05 S1.2 S1.4 ; C1.1 693.76,1044.76 720,1071 1094,1071 L1.2 1220,789.04 1280.04,729 1400,729 1443.07,685.93 1443.07,607.56 ; 1443.07,607.56 U1.2 1443.07,394.07 1442.5,393.5 1442.5,328 1450.5,320 1505,320 1525,300 1525,240 1536.63,228.37 1587.17,228.37 1598.8,240 1598.8,263.48 1656.32,321 1759.63,321 S1.1@1825,255.63
  Bottom Layer w7: S1.1 1852.63,228 2107.37,228 S1.2
VIN-: C1.2 C2.1 C3.1 C4.2 R1.1 U1.1 VIN.2 VOUT.2 | length 4812.7
  Top Layer w7: VIN.2 210,540 276,550 440,714 575,714 C1.2 ; U1.1 1376.14,546.46 1393.31,563.62 1408.9,563.62 ; v1(1417.07,616.55) 1417.07,611.68 1408.9,603.51 1408.9,563.62 ; R1.1 1446.22,299.28 1425.5,320 1425.5,433.51 1408.9,450.11 1408.9,563.62 ; v1(1710,380) 1712.53,380 1727.53,395 1755,395 ; v1(1755,380) v1@1755,390 ; v1(1780,570) 1780,420 ; C2.1 1810,362.56 1780,392.56 1780,415 ; C4.2 1920,452 1960,412 2080,412 2125,457 2125,567.34 2127.44,569.78 ; C3.1 2127.44,569.78 ; VOUT.2 2127.44,569.78 ; v1@1755,390 1780,415 ; v1@1755,390 1755,395 ; 1755,395 1780,420 ; 1780,415 1780,420
  Bottom Layer w7: VIN.2 354,346 549,346 602.61,399.61 865.39,399.61 902.28,436.5 1653.5,436.5 ; v1(1417.07,616.55) 1473.44,616.55 1653.5,436.5 ; v1(1710,380) 1653.5,436.5 ; 1731.5,436.5 1653.5,436.5 ; v1(1780,570) 1917.34,707.34 VOUT.2
VOUT+: C3.2 C4.1 D1.2 RN2.2 RV1.2 RV1.3 VOUT.1 | length 2223.4
  Top Layer w7: RV1.2 1925,957 1920,952 C4.1 1920,750.95 ; RN2.2 1956.71,339.75 1938,339.75 1929,330.75 1862,330.75 1862,379 1809.05,431.95 1809.05,672.59 1848.23,711.77 1880.82,711.77 1920,750.95 ; D1.2 1989.5,576.5 ; C3.2 2182.56,424.9 VOUT.1 2317,559.34 2317,740 2297,760 2173,760 1989.5,576.5 ; 1920,750.95 1920,721 1989.5,651.5 1989.5,576.5
  Bottom Layer w7: RV1.2 RV1.3
pads on no net: J1.2 U1.6 U3.1 U3.3 U3.4 U3.5 U3.6

## Keep-outs
Keep-Out Layer:
  the board outline again, w30

## Silkscreen, mask and mechanical layers (free items; w line width, h text height)
Top Overlay:
  text "HW-128 HC" at 930,585.84 h70
  text "© Med Khalil" at 940,501.07 h68

## Text inside footprints (layer, text, board x,y; h text height)
LED: Top Overlay "*" at 1060,40 h50 r90; Mechanical 13 "*" at 1063,42 h50 r90